# EAGLE board Temperature Sensor Rev.2 (EAGLE 7.6.0)
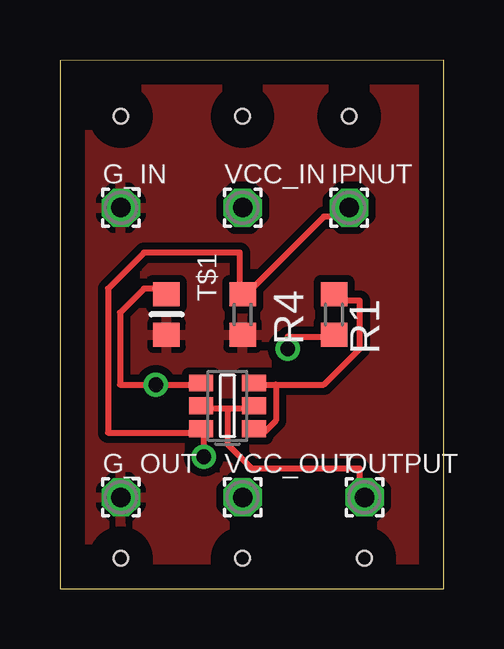
[diagram p0: board, top side]
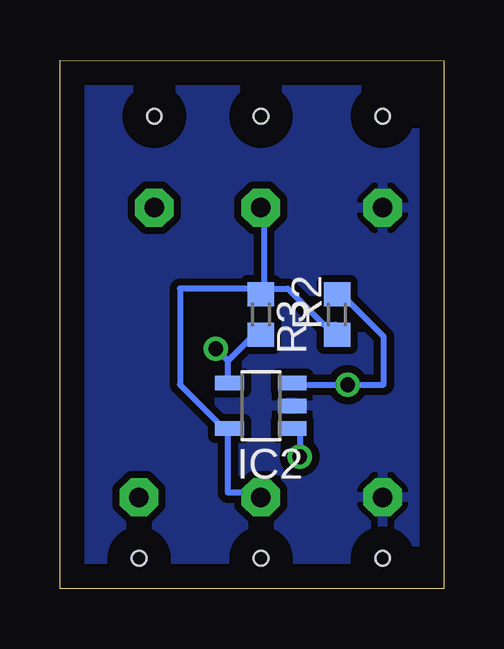
[diagram p1: board, bottom side, seen from below]

Size 16 x 22.03 mm. Coordinates in mm from the lower left corner, seen from the top.
Outline: 0,0 16,0 16,22.03 0,22 0,0
Copper layers (1*16): Top 0.035mm / dielectric 1.5mm / Bottom 0.035mm
Design rules "default": minimum track width 10mil, minimum drill 24mil, track to track 8mil, track to pad 8mil, pad to pad 8mil, via to via 8mil, smd to smd 8mil, copper to edge 40mil, drill to drill 8mil, minimum pad ring 10mil, minimum via ring 8mil, stop-mask expansion 4mil, vias tented up to drill 0mil, thermal gap 10mil
Holes 0.6 mm at 2.54,1.27 7.62,1.27 12.7,1.27 12.06,19.68 7.62,19.68 2.54,19.68

## Footprints (pad centres in the part's own frame; a part is rotated, then mirrored left to right if it is on the bottom)
SOT23-6 = smd 1 x 0.7: P$1 -1.099,0.95; P$2 -1.099,0; P$3 -1.099,-0.95; P$4 1.099,-0.95; P$5 1.099,0; P$6 1.099,0.95
1,6/0,8 = drill 0.813 pad 1.6 octagon: 1 0,0
DBV-R-PDSO-G5 = smd 0.6 x 1.2: 1 -0.95,-1.306; 2 0,-1.306; 3 0.95,-1.306; 4 0.95,1.306; 5 -0.95,1.306
R0603 = smd 1 x 1.1: 1 -0.85,0; 2 0.85,0
0603 = smd 1 x 1.1: P$1 -0.85,0; P$2 0.85,0

## Placement (x,y rotation side)
_  DMG6602  [SOT23-6]  6.99,7.62 180 top
G_IN  [1,6/0,8]  2.54,15.88 0 top
G_OUT  [1,6/0,8]  2.54,3.81 0 top
IC2  TL331  [DBV-R-PDSO-G5]  7.62,7.62 90 bottom
IPNUT  [1,6/0,8]  12.06,15.88 0 top
OUTPUT  [1,6/0,8]  12.7,3.81 0 top
R1  [R0603]  11.43,11.43 270 top
R2  [R0603]  4.45,11.43 90 bottom
R3  [R0603]  7.62,11.43 270 bottom
R4  [R0603]  7.62,11.43 270 top
T$1  THERMISTOR  [0603]  4.45,11.43 270 top
VCC_IN  [1,6/0,8]  7.62,15.88 0 top
VCC_OUT  [1,6/0,8]  7.62,3.81 0 top

## Library data of the parts
_ T$1 = formula electric
G_IN G_OUT IPNUT OUTPUT VCC_IN VCC_OUT = wirepad
IC2 = linear
R1-R4 = resistor

## Nets
COMP_OUT: IC2.4 R1.2 R3.2
GND: G_IN.1 G_OUT.1 IC2.2 R4.2 T$1.P$2
INPUT: _.P$6 IC2.1 IPNUT.1 R4.1
MOS_IN: _.P$1 _.P$3 R1.1
OUTPUT: _.P$2 _.P$5 OUTPUT.1
THERM_OUT: _.P$4 IC2.3 R2.2 T$1.P$1
VCC: IC2.5 R2.1 R3.1 VCC_IN.1 VCC_OUT.1

## Tracks (layer width: path | path; a pad name or v marks a point on that pad's centre or on a via)
COMP_OUT  (via drill 0.61)
  Top 0.254: v9.5,10 9.5,10.5 11,10.5 R1.2
  Bottom 0.254: 9,9.5 8,10.5 R3.2 | 9,9.5 9,8.5 IC2.4 | 9,9.5 v9.5,10
GND
  pour Top (isolate 0.305): 0,0 16,0 16,22 0,22
  pour Bottom (isolate 0.305): 0,0 16,0 16,22 0,22
INPUT  (via drill 0.61)
  Top 0.254: v6,5.5 6,6.5 _.P$6 5.5,6.5 2,6.5 2,12.5 3.5,14 7.5,14 7.5,12.5 R4.1 8,12.5 11,15.5 12,15.5 IPNUT.1
  Bottom 0.254: v6,5.5 6,6.5 IC2.1
MOS_IN
  Top 0.254: 9,8.5 9,7 8.5,6.5 _.P$1 | 9,8.5 8.5,8.5 _.P$3 | 9,8.5 11,8.5 12.5,10 12.5,12 11.5,12 R1.1
OUTPUT
  Top 0.254: 7,7.5 8,7.5 _.P$2 | 7,7.5 6,7.5 _.P$5 | 7,7.5 7,6 8,5 12.5,5 12.5,4 OUTPUT.1
THERM_OUT  (via drill 0.61)
  Top 0.254: _.P$4 5.5,8.5 v4,8.5 2.5,8.5 2.5,11.5 3.5,12.5 4,12.5 R2.2
  Bottom 0.254: R2.2 4,12 2.5,10.5 2.5,8.5 v4,8.5 6,8.5 IC2.3
VCC
  Bottom 0.254: 9,6.5 9,4 8,4 VCC_OUT.1 | 7.5,12.5 6.5,12.5 5,11 4.5,11 R2.1 | 7.5,12.5 7.5,15.5 VCC_IN.1 | 7.5,12.5 R3.1 8,12.5 11,12.5 11,8.5 9,6.5 | 9,6.5 IC2.5